# EAGLE board Load_Cape (EAGLE 7.7.0)
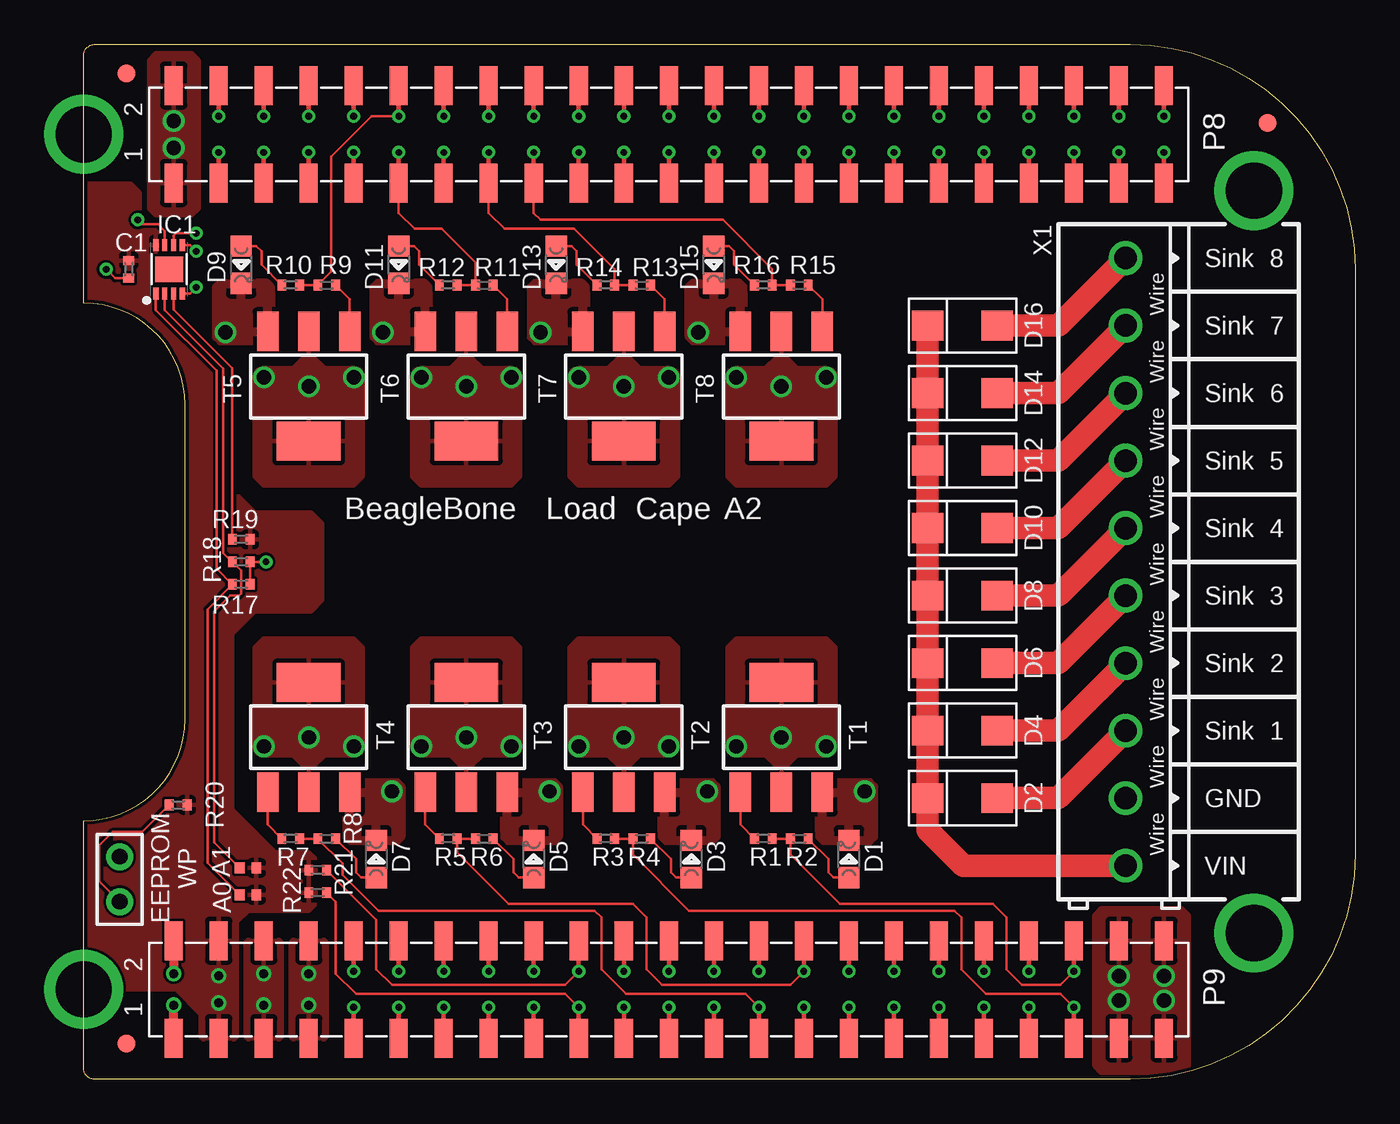
[diagram p0: board, top side]
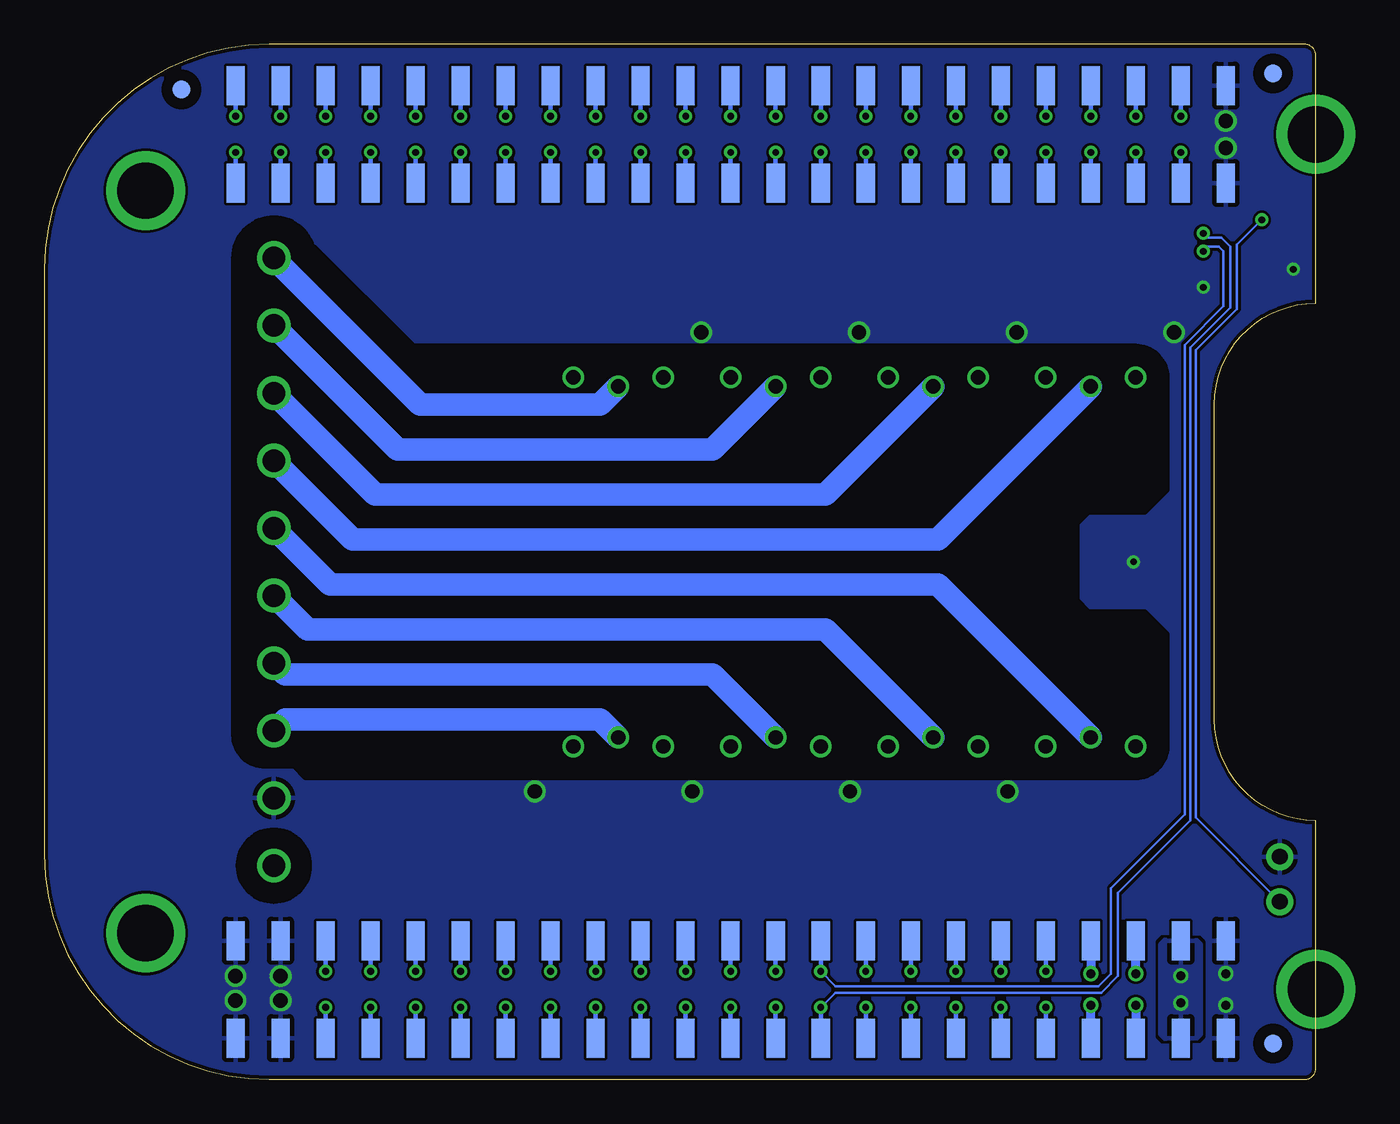
[diagram p1: board, bottom side, seen from below]

Size 71.75 x 58.42 mm. Coordinates in mm from the lower left corner, seen from the top.
Copper layers (1+16): Top 0.035mm / dielectric 1.5mm / Bottom 0.035mm
Design rules "SparkFun-2-layer *": minimum track width 6mil, minimum drill 15mil, track to track 6mil, track to pad 6mil, pad to pad 6mil, via to via 6mil, smd to smd 6mil, copper to edge 8mil, drill to drill 8mil, minimum pad ring 12mil, minimum via ring 7mil, stop-mask expansion 4mil, vias tented up to drill 32mil, thermal gap 10mil
tRestrict: 4 lines

## Footprints (pad centres in the part's own frame; a part is rotated, then mirrored left to right if it is on the bottom)
BEAGLEBONE.CAPE.TOP/BOTTOM-PADS = smd 1.02 x 2.2 bottom: B8.1 5.08,50.59; B8.2 5.08,56.09; B8.3 7.62,50.59; B8.4 7.62,56.09; B8.5 10.16,50.59; B8.6 10.16,56.09; B8.7 12.7,50.59; B8.8 12.7,56.09; B8.9 15.24,50.59; B8.10 15.24,56.09; B8.11 17.78,50.59; B8.12 17.78,56.09; B8.13 20.32,50.59; B8.14 20.32,56.09; B8.15 22.86,50.59; B8.16 22.86,56.09; B8.17 25.4,50.59; B8.18 25.4,56.09; B8.19 27.94,50.59; B8.20 27.94,56.09; B8.21 30.48,50.59; B8.22 30.48,56.09; B8.23 33.02,50.59; B8.24 33.02,56.09; B8.25 35.56,50.59; B8.26 35.56,56.09; B8.27 38.1,50.59; B8.28 38.1,56.09; B8.29 40.64,50.59; B8.30 40.64,56.09; B8.31 43.18,50.59; B8.32 43.18,56.09; B8.33 45.72,50.59; B8.34 45.72,56.09; B8.35 48.26,50.59; B8.36 48.26,56.09; B8.37 50.8,50.59; B8.38 50.8,56.09; B8.39 53.34,50.59; B8.40 53.34,56.09; B8.41 55.88,50.59; B8.42 55.88,56.09; B8.43 58.42,50.59; B8.44 58.42,56.09; B8.45 60.96,50.59; B8.46 60.96,56.09; B9.1 5.08,2.33; B9.2 5.08,7.83; B9.3 7.62,2.33; B9.4 7.62,7.83; B9.5 10.16,2.33; B9.6 10.16,7.83; B9.7 12.7,2.33; B9.8 12.7,7.83; B9.9 15.24,2.33; B9.10 15.24,7.83; B9.11 17.78,2.33; B9.12 17.78,7.83; B9.13 20.32,2.33; B9.14 20.32,7.83; B9.15 22.86,2.33; B9.16 22.86,7.83; B9.17 25.4,2.33; B9.18 25.4,7.83; B9.19 27.94,2.33; B9.20 27.94,7.83; B9.21 30.48,2.33; B9.22 30.48,7.83; B9.23 33.02,2.33; B9.24 33.02,7.83; B9.25 35.56,2.33; B9.26 35.56,7.83; B9.27 38.1,2.33; B9.28 38.1,7.83; B9.29 40.64,2.33; B9.30 40.64,7.83; B9.31 43.18,2.33; B9.32 43.18,7.83; B9.33 45.72,2.33; B9.34 45.72,7.83; B9.35 48.26,2.33; B9.36 48.26,7.83; B9.37 50.8,2.33; B9.38 50.8,7.83; B9.39 53.34,2.33; B9.40 53.34,7.83; B9.41 55.88,2.33; B9.42 55.88,7.83; B9.43 58.42,2.33; B9.44 58.42,7.83; B9.45 60.96,2.33; B9.46 60.96,7.83 | drill 3.175 pad 4.445: MH.1 0,5.08; MH.2 66.04,8.255; MH.3 66.04,50.165; MH.4 0,53.34 | smd 1.02 x 2.2: T8.1 5.08,50.59; T8.2 5.08,56.09; T8.3 7.62,50.59; T8.4 7.62,56.09; T8.5 10.16,50.59; T8.6 10.16,56.09; T8.7 12.7,50.59; T8.8 12.7,56.09; T8.9 15.24,50.59; T8.10 15.24,56.09; T8.11 17.78,50.59; T8.12 17.78,56.09; T8.13 20.32,50.59; T8.14 20.32,56.09; T8.15 22.86,50.59; T8.16 22.86,56.09; T8.17 25.4,50.59; T8.18 25.4,56.09; T8.19 27.94,50.59; T8.20 27.94,56.09; T8.21 30.48,50.59; T8.22 30.48,56.09; T8.23 33.02,50.59; T8.24 33.02,56.09; T8.25 35.56,50.59; T8.26 35.56,56.09; T8.27 38.1,50.59; T8.28 38.1,56.09; T8.29 40.64,50.59; T8.30 40.64,56.09; T8.31 43.18,50.59; T8.32 43.18,56.09; T8.33 45.72,50.59; T8.34 45.72,56.09; T8.35 48.26,50.59; T8.36 48.26,56.09; T8.37 50.8,50.59; T8.38 50.8,56.09; T8.39 53.34,50.59; T8.40 53.34,56.09; T8.41 55.88,50.59; T8.42 55.88,56.09; T8.43 58.42,50.59; T8.44 58.42,56.09; T8.45 60.96,50.59; T8.46 60.96,56.09; T9.1 5.08,2.33; T9.2 5.08,7.83; T9.3 7.62,2.33; T9.4 7.62,7.83; T9.5 10.16,2.33; T9.6 10.16,7.83; T9.7 12.7,2.33; T9.8 12.7,7.83; T9.9 15.24,2.33; T9.10 15.24,7.83; T9.11 17.78,2.33; T9.12 17.78,7.83; T9.13 20.32,2.33; T9.14 20.32,7.83; T9.15 22.86,2.33; T9.16 22.86,7.83; T9.17 25.4,2.33; T9.18 25.4,7.83; T9.19 27.94,2.33; T9.20 27.94,7.83; T9.21 30.48,2.33; T9.22 30.48,7.83; T9.23 33.02,2.33; T9.24 33.02,7.83; T9.25 35.56,2.33; T9.26 35.56,7.83; T9.27 38.1,2.33; T9.28 38.1,7.83; T9.29 40.64,2.33; T9.30 40.64,7.83; T9.31 43.18,2.33; T9.32 43.18,7.83; T9.33 45.72,2.33; T9.34 45.72,7.83; T9.35 48.26,2.33; T9.36 48.26,7.83; T9.37 50.8,2.33; T9.38 50.8,7.83; T9.39 53.34,2.33; T9.40 53.34,7.83; T9.41 55.88,2.33; T9.42 55.88,7.83; T9.43 58.42,2.33; T9.44 58.42,7.83; T9.45 60.96,2.33; T9.46 60.96,7.83
0402 = smd 0.5 x 0.6: 1 -0.5,0; 2 0.5,0
0805-LED = smd 1.2 x 1.2: A 0,1.05; K 0,-1.05
DIODE_SMA = smd 1.778 x 1.676: A -1.905,0; K 2.032,0
FIDUCIAL_40MIL = smd 1.016 x 1.016: P$1 0,0
UDFN8,2X3(ON-SEMI) = smd 0.3 x 0.68: 1 0.75,1.36; 2 0.25,1.36; 3 -0.25,1.36; 4 -0.75,1.36; 5 -0.75,-1.36; 6 -0.25,-1.36; 7 0.25,-1.36; 8 0.75,-1.36 | smd 1.56 x 1.45: P$1 0,0
JUMPER-(X2) = drill 0.889 pad 1.524: 1 -1.27,0; 2 1.27,0
SOLDER.JOINT(0402) = smd 0.55 x 0.6: 1 -0.475,0; 2 0.475,0
SOT223 = smd 1.219 x 2.235: 1 -2.311,-3.099; 2 0,-3.099; 3 2.311,-3.099 | smd 3.6 x 2.2: 4 0,3.099
TERMINAL.BLOCK-10TERM-150MIL.PITCH = drill 1.27 pad 1.905: 1 -17.145,0; 2 -13.335,0; 3 -9.525,0; 4 -5.715,0; 5 -1.905,0; 6 1.905,0; 7 5.715,0; 8 9.525,0; 9 13.335,0; 10 17.145,0

## Placement (x,y rotation side)
BB.CAPE1  BEAGLEBONE.CAPE.TOP/BOTTOM-PADS  [BEAGLEBONE.CAPE.TOP/BOTTOM-PADS]  0,0 0 top
C1  [0402]  2.54,45.72 270 top
D1  RED  [0805-LED]  43.18,12.45 180 top
D2  STPS140A  [DIODE_SMA]  49.66,15.88 180 top
D3  RED  [0805-LED]  34.29,12.45 180 top
D4  STPS140A  [DIODE_SMA]  49.66,19.68 180 top
D5  RED  [0805-LED]  25.4,12.45 180 top
D6  STPS140A  [DIODE_SMA]  49.66,23.5 180 top
D7  RED  [0805-LED]  16.51,12.45 180 top
D8  STPS140A  [DIODE_SMA]  49.66,27.3 180 top
D9  RED  [0805-LED]  8.89,45.97 0 top
D10  STPS140A  [DIODE_SMA]  49.66,31.11 180 top
D11  RED  [0805-LED]  17.78,45.97 0 top
D12  STPS140A  [DIODE_SMA]  49.66,34.92 180 top
D13  RED  [0805-LED]  26.67,45.97 0 top
D14  STPS140A  [DIODE_SMA]  49.66,38.73 180 top
D15  RED  [0805-LED]  35.56,45.97 0 top
D16  STPS140A  [DIODE_SMA]  49.66,42.55 180 top
FUD1  FIDUCIAL  [FIDUCIAL_40MIL]  2.41,2.03 0 top
FUD2  FIDUCIAL  [FIDUCIAL_40MIL]  66.8,53.98 0 top
FUD3  FIDUCIAL  [FIDUCIAL_40MIL]  2.41,56.77 0 top
FUD4  FIDUCIAL  [FIDUCIAL_40MIL]  2.41,2.03 0 bottom
FUD5  FIDUCIAL  [FIDUCIAL_40MIL]  64.01,55.88 0 bottom
FUD6  FIDUCIAL  [FIDUCIAL_40MIL]  2.41,56.77 0 bottom
IC1  [UDFN8,2X3(ON-SEMI)]  4.83,45.72 180 top
JMP1  JUMPER-(X2)  [JUMPER-(X2)]  2.03,11.3 90 top
R1  330  [0402]  38.35,13.59 180 top
R2  1k  [0402]  40.39,13.59 0 top
R3  330  [0402]  29.46,13.59 180 top
R4  1k  [0402]  31.5,13.59 0 top
R5  330  [0402]  20.57,13.59 180 top
R6  1k  [0402]  22.61,13.59 0 top
R7  330  [0402]  11.68,13.59 180 top
R8  1k  [0402]  13.72,13.59 0 top
R9  330  [0402]  13.72,44.83 0 top
R10  1k  [0402]  11.68,44.83 180 top
R11  330  [0402]  22.61,44.83 0 top
R12  1k  [0402]  20.57,44.83 180 top
R13  330  [0402]  31.5,44.83 0 top
R14  1k  [0402]  29.46,44.83 180 top
R15  330  [0402]  40.39,44.83 0 top
R16  1k  [0402]  38.35,44.83 180 top
R17  1k  [0402]  8.89,27.94 180 top
R18  1k  [0402]  8.89,29.21 180 top
R19  1k  [0402]  8.89,30.48 180 top
R20  1k  [0402]  5.33,15.49 0 top
R21  DNP(2.2k)  [0402]  13.21,11.81 180 top
R22  DNP(2.2k)  [0402]  13.21,10.54 180 top
SJ1  [SOLDER.JOINT(0402)]  9.27,10.41 180 top
SJ2  [SOLDER.JOINT(0402)]  9.27,11.94 180 top
T1  PBSS4350Z 50V 3A  [SOT223]  39.37,19.3 0 top
T2  PBSS4350Z 50V 3A  [SOT223]  30.48,19.3 0 top
T3  PBSS4350Z 50V 3A  [SOT223]  21.59,19.3 0 top
T4  PBSS4350Z 50V 3A  [SOT223]  12.7,19.3 0 top
T5  PBSS4350Z 50V 3A  [SOT223]  12.7,39.12 180 top
T6  PBSS4350Z 50V 3A  [SOT223]  21.59,39.12 180 top
T7  PBSS4350Z 50V 3A  [SOT223]  30.48,39.12 180 top
T8  PBSS4350Z 50V 3A  [SOT223]  39.37,39.12 180 top
X1  [TERMINAL.BLOCK-10TERM-150MIL.PITCH]  58.8,29.21 270 top

## Library data of the parts
BB.CAPE1 = GHI-Solutions
C1 D1 D3 D5 D7 D9 D11 D13 D15 R1-R22 = GHI-BasicComponents
D2 D4 D6 D8 D10 D12 D14 D16 FUD1-FUD6 = GHI
IC1 = GHI-IC
JMP1 = GHI-Headers
SJ1 SJ2 = GHI-Miscellaneous
T1-T8 = GHI-Transistors
X1 = GHI-Connectors

## Nets
+5V: BB.CAPE1.B9.7 BB.CAPE1.B9.8 BB.CAPE1.T9.7 BB.CAPE1.T9.8
A0: IC1.1 R17.2 SJ1.2
A1: IC1.2 R18.2 SJ2.2
A2: IC1.3 R19.2
GND: BB.CAPE1.B8.1 BB.CAPE1.B8.2 BB.CAPE1.B9.1 BB.CAPE1.B9.2 BB.CAPE1.B9.43 BB.CAPE1.B9.44 BB.CAPE1.B9.45 BB.CAPE1.B9.46 BB.CAPE1.T8.1 BB.CAPE1.T8.2 BB.CAPE1.T9.1 BB.CAPE1.T9.2 BB.CAPE1.T9.43 BB.CAPE1.T9.44 BB.CAPE1.T9.45 BB.CAPE1.T9.46 C1.2 D1.K D3.K D5.K D7.K D9.K D11.K D13.K D15.K IC1.4 JMP1.2 R17.1 R18.1 T1.3 T2.3 T3.3 T4.3 T5.3 T6.3 T7.3 T8.3 X1.9
N$3: D13.A R14.2
N$4: R13.2 T7.1
N$5: D11.A R12.2
N$6: R11.2 T6.1
N$7: D9.A R10.2
N$8: R9.2 T5.1
N$9: D7.A R8.2
N$10: R7.2 T4.1
N$11: D5.A R6.2
N$12: R5.2 T3.1
N$13: D3.A R4.2
N$35: R3.2 T2.1
N$36: D1.A R2.2
N$37: R1.2 T1.1
N$38: D15.A R16.2
N$39: R15.2 T8.1
P8.3: BB.CAPE1.B8.3 BB.CAPE1.T8.3
P8.4: BB.CAPE1.B8.4 BB.CAPE1.T8.4
P8.5: BB.CAPE1.B8.5 BB.CAPE1.T8.5
P8.6: BB.CAPE1.B8.6 BB.CAPE1.T8.6
P8.7: BB.CAPE1.B8.7 BB.CAPE1.T8.7
P8.8: BB.CAPE1.B8.8 BB.CAPE1.T8.8
P8.9: BB.CAPE1.B8.9 BB.CAPE1.T8.9
P8.10: BB.CAPE1.B8.10 BB.CAPE1.T8.10
P8.13: BB.CAPE1.B8.13 BB.CAPE1.T8.13
P8.14: BB.CAPE1.B8.14 BB.CAPE1.T8.14
P8.16: BB.CAPE1.B8.16 BB.CAPE1.T8.16
P8.18: BB.CAPE1.B8.18 BB.CAPE1.T8.18
P8.19: BB.CAPE1.B8.19 BB.CAPE1.T8.19
P8.20: BB.CAPE1.B8.20 BB.CAPE1.T8.20
P8.21: BB.CAPE1.B8.21 BB.CAPE1.T8.21
P8.22: BB.CAPE1.B8.22 BB.CAPE1.T8.22
P8.23: BB.CAPE1.B8.23 BB.CAPE1.T8.23
P8.24: BB.CAPE1.B8.24 BB.CAPE1.T8.24
P8.25: BB.CAPE1.B8.25 BB.CAPE1.T8.25
P8.26: BB.CAPE1.B8.26 BB.CAPE1.T8.26
P8.27: BB.CAPE1.B8.27 BB.CAPE1.T8.27
P8.28: BB.CAPE1.B8.28 BB.CAPE1.T8.28
P8.29: BB.CAPE1.B8.29 BB.CAPE1.T8.29
P8.30: BB.CAPE1.B8.30 BB.CAPE1.T8.30
P8.31: BB.CAPE1.B8.31 BB.CAPE1.T8.31
P8.32: BB.CAPE1.B8.32 BB.CAPE1.T8.32
P8.33: BB.CAPE1.B8.33 BB.CAPE1.T8.33
P8.34: BB.CAPE1.B8.34 BB.CAPE1.T8.34
P8.35: BB.CAPE1.B8.35 BB.CAPE1.T8.35
P8.36: BB.CAPE1.B8.36 BB.CAPE1.T8.36
P8.37: BB.CAPE1.B8.37 BB.CAPE1.T8.37
P8.38: BB.CAPE1.B8.38 BB.CAPE1.T8.38
P8.39: BB.CAPE1.B8.39 BB.CAPE1.T8.39
P8.40: BB.CAPE1.B8.40 BB.CAPE1.T8.40
P8.41: BB.CAPE1.B8.41 BB.CAPE1.T8.41
P8.42: BB.CAPE1.B8.42 BB.CAPE1.T8.42
P8.43: BB.CAPE1.B8.43 BB.CAPE1.T8.43
P8.44: BB.CAPE1.B8.44 BB.CAPE1.T8.44
P8.45: BB.CAPE1.B8.45 BB.CAPE1.T8.45
P8.46: BB.CAPE1.B8.46 BB.CAPE1.T8.46
P9.9: BB.CAPE1.B9.9 BB.CAPE1.T9.9
P9.10: BB.CAPE1.B9.10 BB.CAPE1.T9.10
P9.11: BB.CAPE1.B9.11 BB.CAPE1.T9.11
P9.12: BB.CAPE1.B9.12 BB.CAPE1.T9.12
P9.13: BB.CAPE1.B9.13 BB.CAPE1.T9.13
P9.14: BB.CAPE1.B9.14 BB.CAPE1.T9.14
P9.15: BB.CAPE1.B9.15 BB.CAPE1.T9.15
P9.16: BB.CAPE1.B9.16 BB.CAPE1.T9.16
P9.17: BB.CAPE1.B9.17 BB.CAPE1.T9.17
P9.18: BB.CAPE1.B9.18 BB.CAPE1.T9.18
P9.21: BB.CAPE1.B9.21 BB.CAPE1.T9.21
P9.22: BB.CAPE1.B9.22 BB.CAPE1.T9.22
P9.23: BB.CAPE1.B9.23 BB.CAPE1.T9.23
P9.24: BB.CAPE1.B9.24 BB.CAPE1.T9.24
P9.25: BB.CAPE1.B9.25 BB.CAPE1.T9.25
P9.26: BB.CAPE1.B9.26 BB.CAPE1.T9.26
P9.28: BB.CAPE1.B9.28 BB.CAPE1.T9.28
P9.29: BB.CAPE1.B9.29 BB.CAPE1.T9.29
P9.31: BB.CAPE1.B9.31 BB.CAPE1.T9.31
P9.32: BB.CAPE1.B9.32 BB.CAPE1.T9.32
P9.33: BB.CAPE1.B9.33 BB.CAPE1.T9.33
P9.34: BB.CAPE1.B9.34 BB.CAPE1.T9.34
P9.35: BB.CAPE1.B9.35 BB.CAPE1.T9.35
P9.36: BB.CAPE1.B9.36 BB.CAPE1.T9.36
P9.37: BB.CAPE1.B9.37 BB.CAPE1.T9.37
P9.38: BB.CAPE1.B9.38 BB.CAPE1.T9.38
P9.39: BB.CAPE1.B9.39 BB.CAPE1.T9.39
P9.40: BB.CAPE1.B9.40 BB.CAPE1.T9.40
SCL: BB.CAPE1.B9.19 BB.CAPE1.T9.19 IC1.6 R22.1
SDA: BB.CAPE1.B9.20 BB.CAPE1.T9.20 IC1.5 R21.1
SINK1: BB.CAPE1.B9.42 BB.CAPE1.T9.42 R1.1 R2.1
SINK1.TB: D2.A T1.2 T1.4 X1.8
SINK2: BB.CAPE1.B9.41 BB.CAPE1.T9.41 R3.1 R4.1
SINK2.TB: D4.A T2.2 T2.4 X1.7
SINK3: BB.CAPE1.B9.30 BB.CAPE1.T9.30 R5.1 R6.1
SINK3.TB: D6.A T3.2 T3.4 X1.6
SINK4: BB.CAPE1.B9.27 BB.CAPE1.T9.27 R7.1 R8.1
SINK4.TB: D8.A T4.2 T4.4 X1.5
SINK5: BB.CAPE1.B8.12 BB.CAPE1.T8.12 R9.1 R10.1
SINK5.TB: D10.A T5.2 T5.4 X1.4
SINK6: BB.CAPE1.B8.11 BB.CAPE1.T8.11 R11.1 R12.1
SINK6.TB: D12.A T6.2 T6.4 X1.3
SINK7: BB.CAPE1.B8.15 BB.CAPE1.T8.15 R13.1 R14.1
SINK7.TB: D14.A T7.2 T7.4 X1.2
SINK8: BB.CAPE1.B8.17 BB.CAPE1.T8.17 R15.1 R16.1
SINK8.TB: D16.A T8.2 T8.4 X1.1
VCC: BB.CAPE1.B9.3 BB.CAPE1.B9.4 BB.CAPE1.T9.3 BB.CAPE1.T9.4 C1.1 IC1.8 R19.1 R20.2 R21.2 R22.2 SJ1.1 SJ2.1
VDD_5V: BB.CAPE1.B9.5 BB.CAPE1.B9.6 BB.CAPE1.T9.5 BB.CAPE1.T9.6
VIN: D2.K D4.K D6.K D8.K D10.K D12.K D14.K D16.K X1.10
WP: IC1.7 JMP1.1 R20.1

## Tracks (layer width: path | path; a pad name or v marks a point on that pad's centre or on a via)
+5V  (via drill 0.51 pad 0.18)
  Bottom 0.508: BB.CAPE1.B9.8 v12.7,5.97 | BB.CAPE1.B9.7 v12.7,4.19
  pour Top (rank 2): 13.34,8.13 12.06,8.13 11.68,7.75 11.68,2.41 12.06,2.03 13.34,2.03 13.72,2.41 13.72,7.75
A0
  Top 0.152: IC1.1 4.08,43.42 7.49,40.01 7.49,28.84 R17.2 6.99,26.54 6.99,12.22 SJ1.2
A1
  Top 0.152: IC1.2 4.58,43.43 7.88,40.13 7.88,29.72 R18.2 8.89,28.71 8.89,27.43 8.76,27.3 8.26,27.3 7.37,26.42 7.37,13.37 SJ2.2
A2
  Top 0.152: 8.38,30.49 R19.2 8.38,40.13 5.08,43.44 IC1.3
GND  (via drill 0.38 pad 0.18, 0.51 pad 0.18, 0.81 pad 0.18)
  Top 0.152: IC1.4 6.01,44.36 v6.35,44.7 | R17.1 R18.1 v10.29,29.21 | C1.2 1.77,45.22 v1.27,45.72
  Top 0.508: BB.CAPE1.T9.2 v5.08,5.97 | BB.CAPE1.T9.1 v5.08,4.19
  other vias: 44.07,16.26 35.18,16.26 26.29,16.26 17.4,16.26 8,42.16 16.89,42.16 25.78,42.16 34.67,42.16 58.42,4.45 60.96,4.45 5.08,52.58 58.42,5.84 60.96,5.84 5.08,54.1
  pour Bottom (rank 2): 72.39,59.05 -0.64,59.05 -0.64,-0.64 72.39,-0.64
  pour Top: 41.53,16.76 44.32,16.76 44.58,16.51 44.58,13.72 44.32,13.46 41.78,13.46 41.53,13.72
  pour Top: 32.64,16.76 35.43,16.76 35.69,16.51 35.69,13.72 35.43,13.46 32.89,13.46 32.64,13.72
  pour Top: 23.75,16.76 26.54,16.76 26.8,16.51 26.8,13.72 26.54,13.46 24,13.46 23.75,13.72
  pour Top: 14.86,16.76 17.65,16.76 17.91,16.51 17.91,13.72 17.65,13.46 15.11,13.46 14.86,13.72
  pour Top: 10.54,41.66 7.75,41.66 7.49,41.91 7.49,44.7 7.75,44.96 10.29,44.96 10.54,44.7
  pour Top: 19.43,41.66 16.64,41.66 16.38,41.91 16.38,44.7 16.64,44.96 19.18,44.96 19.43,44.7
  pour Top: 28.32,41.66 25.53,41.66 25.27,41.91 25.27,44.7 25.53,44.96 28.07,44.96 28.32,44.7
  pour Top: 37.21,41.66 34.42,41.66 34.16,41.91 34.16,44.7 34.42,44.96 36.96,44.96 37.21,44.7
  pour Top: 61.98,9.65 57.4,9.65 57.02,9.27 57.02,0.76 57.4,0.38 61.98,0.38 62.36,0.76 62.36,9.27
  pour Top: 4.06,57.91 6.1,57.91 6.48,57.53 6.48,49.15 6.1,48.77 4.06,48.77 3.68,49.15 3.68,57.53
N$3
  Top 0.152: R14.2 27.81,45.98 27.81,46.74 27.52,47.02 D13.A
N$4
  Top 0.152: T7.1 32.79,44.04 R13.2
N$5
  Top 0.152: R12.2 18.92,45.98 18.92,46.74 18.64,47.02 D11.A
N$6
  Top 0.152: T6.1 23.9,44.04 R11.2
N$7
  Top 0.152: R10.2 10.03,45.98 10.03,46.74 9.74,47.02 D9.A
N$8
  Top 0.152: T5.1 15.01,44.04 R9.2
N$9
  Top 0.152: R8.2 15.37,12.44 15.37,11.68 15.65,11.4 D7.A
N$10
  Top 0.152: T4.1 10.39,14.38 R7.2
N$11
  Top 0.152: R6.2 24.26,12.44 24.26,11.68 24.55,11.4 D5.A
N$12
  Top 0.152: T3.1 19.28,14.38 R5.2
N$13
  Top 0.152: R4.2 33.15,12.44 33.15,11.68 33.44,11.4 D3.A
N$35
  Top 0.152: T2.1 28.17,14.38 R3.2
N$36
  Top 0.152: R2.2 42.04,12.44 42.04,11.68 42.33,11.4 D1.A
N$37
  Top 0.152: T1.1 37.06,14.38 R1.2
N$38
  Top 0.152: R16.2 36.7,45.98 36.7,46.74 36.41,47.02 D15.A
N$39
  Top 0.152: T8.1 41.68,44.04 R15.2
N$40
  cutout Bottom: 8.38,18.8 8.38,25.15 9.65,26.42 12.83,26.42 13.46,27.05 13.46,31.37 12.83,32 9.65,32 8.38,33.27 8.38,39.62 arc-90 10.16,41.4 50.93,41.4 56.52,46.99 56.52,46.35 arc-90 58.8,48.64 arc-90 61.09,46.35 61.09,19.43 arc-90 59.31,17.65 57.66,17.65 57.02,17.02 10.16,17.02 arc-90
N$41
  cutout Bottom: 58.8,10.03 arc-90 56.77,12.06 arc-90 58.8,14.1 arc-90 60.83,12.06 arc-90
P8.3  (via drill 0.38 pad 0.18)
  Top 0.254: BB.CAPE1.B8.3 v7.62,52.32
  Bottom 0.254: v7.62,52.32 BB.CAPE1.B8.3
P8.4  (via drill 0.38 pad 0.18)
  Top 0.254: v7.62,54.36 BB.CAPE1.T8.4
  Bottom 0.254: BB.CAPE1.T8.4 v7.62,54.36
P8.5  (via drill 0.38 pad 0.18)
  Top 0.254: v10.16,52.32 BB.CAPE1.T8.5
  Bottom 0.254: BB.CAPE1.T8.5 v10.16,52.32
P8.6  (via drill 0.38 pad 0.18)
  Top 0.254: BB.CAPE1.T8.6 v10.16,54.36
  Bottom 0.254: v10.16,54.36 BB.CAPE1.T8.6
P8.7  (via drill 0.38 pad 0.18)
  Top 0.254: BB.CAPE1.B8.7 v12.7,52.32
  Bottom 0.254: v12.7,52.32 BB.CAPE1.B8.7
P8.8  (via drill 0.38 pad 0.18)
  Top 0.254: v12.7,54.36 BB.CAPE1.T8.8
  Bottom 0.254: BB.CAPE1.T8.8 v12.7,54.36
P8.9  (via drill 0.38 pad 0.18)
  Top 0.254: v15.24,52.32 BB.CAPE1.T8.9
  Bottom 0.254: BB.CAPE1.T8.9 v15.24,52.32
P8.10  (via drill 0.38 pad 0.18)
  Top 0.254: BB.CAPE1.T8.10 v15.24,54.36
  Bottom 0.254: v15.24,54.36 BB.CAPE1.T8.10
P8.13  (via drill 0.38 pad 0.18)
  Top 0.254: BB.CAPE1.T8.13 v20.32,52.32
  Bottom 0.254: v20.32,52.32 BB.CAPE1.T8.13
P8.14  (via drill 0.38 pad 0.18)
  Top 0.254: v20.32,54.36 BB.CAPE1.T8.14
  Bottom 0.254: BB.CAPE1.T8.14 v20.32,54.36
P8.16  (via drill 0.38 pad 0.18)
  Top 0.254: v22.86,54.36 BB.CAPE1.T8.16
  Bottom 0.254: BB.CAPE1.T8.16 v22.86,54.36
P8.18  (via drill 0.38 pad 0.18)
  Top 0.254: BB.CAPE1.T8.18 v25.4,54.36
  Bottom 0.254: v25.4,54.36 BB.CAPE1.T8.18
P8.19  (via drill 0.38 pad 0.18)
  Top 0.254: BB.CAPE1.T8.19 v27.94,52.32
  Bottom 0.254: v27.94,52.32 BB.CAPE1.T8.19
P8.20  (via drill 0.38 pad 0.18)
  Top 0.254: v27.94,54.36 BB.CAPE1.B8.20
  Bottom 0.254: BB.CAPE1.B8.20 v27.94,54.36
P8.21  (via drill 0.38 pad 0.18)
  Top 0.254: v30.48,52.32 BB.CAPE1.T8.21
  Bottom 0.254: BB.CAPE1.T8.21 v30.48,52.32
P8.22  (via drill 0.38 pad 0.18)
  Top 0.254: v30.48,54.36 BB.CAPE1.T8.22
  Bottom 0.254: BB.CAPE1.T8.22 v30.48,54.36
P8.23  (via drill 0.38 pad 0.18)
  Top 0.254: BB.CAPE1.T8.23 v33.02,52.32
  Bottom 0.254: v33.02,52.32 BB.CAPE1.T8.23
P8.24  (via drill 0.38 pad 0.18)
  Top 0.254: BB.CAPE1.T8.24 v33.02,54.36
  Bottom 0.254: v33.02,54.36 BB.CAPE1.T8.24
P8.25  (via drill 0.38 pad 0.18)
  Top 0.254: v35.56,52.32 BB.CAPE1.B8.25
  Bottom 0.254: BB.CAPE1.B8.25 v35.56,52.32
P8.26  (via drill 0.38 pad 0.18)
  Top 0.254: v35.56,54.36 BB.CAPE1.B8.26
  Bottom 0.254: BB.CAPE1.B8.26 v35.56,54.36
P8.27  (via drill 0.38 pad 0.18)
  Top 0.254: BB.CAPE1.B8.27 v38.1,52.32
  Bottom 0.254: v38.1,52.32 BB.CAPE1.B8.27
P8.28  (via drill 0.38 pad 0.18)
  Top 0.254: BB.CAPE1.T8.28 v38.1,54.36
  Bottom 0.254: v38.1,54.36 BB.CAPE1.T8.28
P8.29  (via drill 0.38 pad 0.18)
  Top 0.254: v40.64,52.32 BB.CAPE1.T8.29
  Bottom 0.254: BB.CAPE1.T8.29 v40.64,52.32
P8.30  (via drill 0.38 pad 0.18)
  Top 0.254: v40.64,54.36 BB.CAPE1.T8.30
  Bottom 0.254: BB.CAPE1.T8.30 v40.64,54.36
P8.31  (via drill 0.38 pad 0.18)
  Top 0.254: BB.CAPE1.T8.31 v43.18,52.32
  Bottom 0.254: v43.18,52.32 BB.CAPE1.T8.31
P8.32  (via drill 0.38 pad 0.18)
  Top 0.254: BB.CAPE1.T8.32 v43.18,54.36
  Bottom 0.254: v43.18,54.36 BB.CAPE1.T8.32
P8.33  (via drill 0.38 pad 0.18)
  Top 0.254: v45.72,52.32 BB.CAPE1.T8.33
  Bottom 0.254: BB.CAPE1.T8.33 v45.72,52.32
P8.34  (via drill 0.38 pad 0.18)
  Top 0.254: BB.CAPE1.B8.34 v45.72,54.36
  Bottom 0.254: v45.72,54.36 BB.CAPE1.B8.34
P8.35  (via drill 0.38 pad 0.18)
  Top 0.254: BB.CAPE1.B8.35 v48.26,52.32
  Bottom 0.254: v48.26,52.32 BB.CAPE1.B8.35
P8.36  (via drill 0.38 pad 0.18)
  Top 0.254: v48.26,54.36 BB.CAPE1.B8.36
  Bottom 0.254: BB.CAPE1.B8.36 v48.26,54.36
P8.37  (via drill 0.38 pad 0.18)
  Top 0.254: v50.8,52.32 BB.CAPE1.B8.37
  Bottom 0.254: BB.CAPE1.B8.37 v50.8,52.32
P8.38  (via drill 0.38 pad 0.18)
  Top 0.254: BB.CAPE1.T8.38 v50.8,54.36
  Bottom 0.254: v50.8,54.36 BB.CAPE1.T8.38
P8.39  (via drill 0.38 pad 0.18)
  Top 0.254: BB.CAPE1.T8.39 v53.34,52.32
  Bottom 0.254: v53.34,52.32 BB.CAPE1.T8.39
P8.40  (via drill 0.38 pad 0.18)
  Top 0.254: v53.34,54.36 BB.CAPE1.B8.40
  Bottom 0.254: BB.CAPE1.B8.40 v53.34,54.36
P8.41  (via drill 0.38 pad 0.18)
  Top 0.254: v55.88,52.32 BB.CAPE1.T8.41
  Bottom 0.254: BB.CAPE1.T8.41 v55.88,52.32
P8.42  (via drill 0.38 pad 0.18)
  Top 0.254: BB.CAPE1.B8.42 v55.88,54.36
  Bottom 0.254: v55.88,54.36 BB.CAPE1.B8.42
P8.43  (via drill 0.38 pad 0.18)
  Top 0.254: BB.CAPE1.T8.43 v58.42,52.32
  Bottom 0.254: v58.42,52.32 BB.CAPE1.T8.43
P8.44  (via drill 0.38 pad 0.18)
  Top 0.254: v58.42,54.36 BB.CAPE1.T8.44
  Bottom 0.254: BB.CAPE1.T8.44 v58.42,54.36
P8.45  (via drill 0.38 pad 0.18)
  Top 0.254: v60.96,52.32 BB.CAPE1.T8.45
  Bottom 0.254: BB.CAPE1.T8.45 v60.96,52.32
P8.46  (via drill 0.38 pad 0.18)
  Top 0.254: BB.CAPE1.T8.46 v60.96,54.36
  Bottom 0.254: v60.96,54.36 BB.CAPE1.T8.46
P9.9  (via drill 0.38 pad 0.18)
  Top 0.254: BB.CAPE1.T9.9 v15.24,4.06
  Bottom 0.254: v15.24,4.06 BB.CAPE1.T9.9
P9.10  (via drill 0.38 pad 0.18)
  Top 0.254: v15.24,6.1 BB.CAPE1.B9.10
  Bottom 0.254: BB.CAPE1.B9.10 v15.24,6.1
P9.11  (via drill 0.38 pad 0.18)
  Top 0.254: v17.78,4.06 BB.CAPE1.B9.11
  Bottom 0.254: BB.CAPE1.B9.11 v17.78,4.06
P9.12  (via drill 0.38 pad 0.18)
  Top 0.254: BB.CAPE1.B9.12 v17.78,6.1
  Bottom 0.254: v17.78,6.1 BB.CAPE1.B9.12
P9.13  (via drill 0.38 pad 0.18)
  Top 0.254: BB.CAPE1.T9.13 v20.32,4.06
  Bottom 0.254: v20.32,4.06 BB.CAPE1.T9.13
P9.14  (via drill 0.38 pad 0.18)
  Top 0.254: v20.32,6.1 BB.CAPE1.B9.14
  Bottom 0.254: BB.CAPE1.B9.14 v20.32,6.1
P9.15  (via drill 0.38 pad 0.18)
  Top 0.254: v22.86,4.06 BB.CAPE1.B9.15
  Bottom 0.254: BB.CAPE1.B9.15 v22.86,4.06
P9.16  (via drill 0.38 pad 0.18)
  Top 0.254: BB.CAPE1.B9.16 v22.86,6.1
  Bottom 0.254: v22.86,6.1 BB.CAPE1.B9.16
P9.17  (via drill 0.38 pad 0.18)
  Top 0.254: BB.CAPE1.T9.17 v25.4,4.06
  Bottom 0.254: v25.4,4.06 BB.CAPE1.T9.17
P9.18  (via drill 0.38 pad 0.18)
  Top 0.254: v25.4,6.1 BB.CAPE1.T9.18
  Bottom 0.254: BB.CAPE1.T9.18 v25.4,6.1
P9.21  (via drill 0.38 pad 0.18)
  Top 0.254: BB.CAPE1.T9.21 v30.48,4.06
  Bottom 0.254: v30.48,4.06 BB.CAPE1.T9.21
P9.22  (via drill 0.38 pad 0.18)
  Top 0.254: BB.CAPE1.T9.22 v30.48,6.1
  Bottom 0.254: v30.48,6.1 BB.CAPE1.T9.22
P9.23  (via drill 0.38 pad 0.18)
  Top 0.254: v33.02,4.06 BB.CAPE1.T9.23
  Bottom 0.254: BB.CAPE1.T9.23 v33.02,4.06
P9.24  (via drill 0.38 pad 0.18)
  Top 0.254: v33.02,6.1 BB.CAPE1.T9.24
  Bottom 0.254: BB.CAPE1.T9.24 v33.02,6.1
P9.25  (via drill 0.38 pad 0.18)
  Top 0.254: BB.CAPE1.B9.25 v35.56,4.06
  Bottom 0.254: v35.56,4.06 BB.CAPE1.B9.25
P9.26  (via drill 0.38 pad 0.18)
  Top 0.254: BB.CAPE1.T9.26 v35.56,6.1
  Bottom 0.254: v35.56,6.1 BB.CAPE1.T9.26
P9.28  (via drill 0.38 pad 0.18)
  Top 0.254: v38.1,6.1 BB.CAPE1.B9.28
  Bottom 0.254: BB.CAPE1.B9.28 v38.1,6.1
P9.29  (via drill 0.38 pad 0.18)
  Top 0.254: v40.64,4.06 BB.CAPE1.B9.29
  Bottom 0.254: BB.CAPE1.B9.29 v40.64,4.06
P9.31  (via drill 0.38 pad 0.18)
  Top 0.254: BB.CAPE1.B9.31 v43.18,4.06
  Bottom 0.254: v43.18,4.06 BB.CAPE1.B9.31
P9.32  (via drill 0.38 pad 0.18)
  Top 0.254: BB.CAPE1.T9.32 v43.18,6.1
  Bottom 0.254: v43.18,6.1 BB.CAPE1.T9.32
P9.33  (via drill 0.38 pad 0.18)
  Top 0.254: v45.72,4.06 BB.CAPE1.T9.33
  Bottom 0.254: BB.CAPE1.T9.33 v45.72,4.06
P9.34  (via drill 0.38 pad 0.18)
  Top 0.254: v45.72,6.1 BB.CAPE1.T9.34
  Bottom 0.254: BB.CAPE1.T9.34 v45.72,6.1
P9.35  (via drill 0.38 pad 0.18)
  Top 0.254: BB.CAPE1.B9.35 v48.26,4.06
  Bottom 0.254: v48.26,4.06 BB.CAPE1.B9.35
P9.36  (via drill 0.38 pad 0.18)
  Top 0.254: v48.26,6.1 BB.CAPE1.T9.36
  Bottom 0.254: BB.CAPE1.T9.36 v48.26,6.1
P9.37  (via drill 0.38 pad 0.18)
  Top 0.254: v50.8,4.06 BB.CAPE1.T9.37
  Bottom 0.254: BB.CAPE1.T9.37 v50.8,4.06
P9.38  (via drill 0.38 pad 0.18)
  Top 0.254: BB.CAPE1.B9.38 v50.8,6.1
  Bottom 0.254: v50.8,6.1 BB.CAPE1.B9.38
P9.39  (via drill 0.38 pad 0.18)
  Top 0.254: BB.CAPE1.B9.39 v53.34,4.06
  Bottom 0.254: v53.34,4.06 BB.CAPE1.B9.39
P9.40  (via drill 0.38 pad 0.18)
  Top 0.254: v53.34,6.1 BB.CAPE1.T9.40
  Bottom 0.254: BB.CAPE1.T9.40 v53.34,6.1
SCL  (via drill 0.38 pad 0.18)
  Top 0.152: IC1.6 5.08,47.62 5.21,47.75 v6.35,47.75 | v27.94,4.06 27.18,4.83 15.37,4.83 14.22,5.97 14.22,10.03 R22.1
  Top 0.254: v27.94,4.06 BB.CAPE1.T9.19
  Bottom 0.152: v6.35,47.75 6.1,47.5 5.33,47.5 4.83,46.99 4.83,43.56 7.09,41.3 7.09,14.63 11.18,10.54 11.18,5.84 12.12,4.9 27.1,4.9 v27.94,4.06
  Bottom 0.254: v27.94,4.06 BB.CAPE1.T9.19
SDA  (via drill 0.38 pad 0.18)
  Top 0.152: IC1.5 6.01,47.08 v6.35,46.74 | v27.94,6.1 27.18,5.33 17.4,5.33 16.51,6.22 16.51,9.01 R21.1
  Top 0.254: v27.94,6.1 BB.CAPE1.T9.20
  Bottom 0.152: v6.35,46.74 6.1,46.99 5.46,46.99 5.21,46.74 5.21,43.64 7.39,41.45 7.39,14.96 11.56,10.79 11.56,5.97 12.27,5.26 27.1,5.26 v27.94,6.1
  Bottom 0.254: v27.94,6.1 BB.CAPE1.T9.20
SINK1  (via drill 0.38 pad 0.18)
  Top 0.152: R1.1 R2.1 39.89,12.69 42.67,9.91 51.31,9.91 52.07,9.14 52.07,6.22 52.96,5.33 55.12,5.33 v55.88,6.1
  Top 0.254: BB.CAPE1.T9.42 v55.88,6.1
  Bottom 0.254: BB.CAPE1.T9.42 v55.88,6.1
SINK1.TB  (via drill 0.81 pad 0.18)
  Top 1.27: X1.8 54.99,15.88 D2.A
  Bottom 1.27: X1.8 58.17,20.32 40.39,20.32 v39.37,19.3
  other vias: 41.91,18.8 36.83,18.8
  pour Top: 40.26,18.29 41.91,18.29 arc90 42.42,18.8 42.42,24.38 41.91,24.89 36.83,24.89 36.32,24.38 36.32,18.8 arc90 36.83,18.29 38.48,18.29 39.12,17.65 39.12,15.37 39.62,15.37 39.62,17.65
SINK2  (via drill 0.38 pad 0.18)
  Top 0.152: R3.1 R4.1 31,12.69 34.16,9.53 49.15,9.53 49.53,9.14 49.53,6.22 50.93,4.83 55.12,4.83 v55.88,4.06
  Top 0.254: v55.88,4.06 BB.CAPE1.B9.41
  Bottom 0.254: v55.88,4.06 BB.CAPE1.B9.41
SINK2.TB  (via drill 0.81 pad 0.18)
  Top 1.27: X1.7 54.99,19.68 D4.A
  Bottom 1.27: X1.7 58.17,22.86 34.04,22.86 v30.48,19.3
  other vias: 33.02,18.8 27.94,18.8
  pour Top: 31.37,18.29 33.02,18.29 arc90 33.53,18.8 33.53,24.38 33.02,24.89 27.94,24.89 27.43,24.38 27.43,18.8 arc90 27.94,18.29 29.59,18.29 30.23,17.65 30.23,15.37 30.73,15.37 30.73,17.65
SINK3  (via drill 0.38 pad 0.18)
  Top 0.152: R6.1 R5.1 21.07,12.82 23.99,9.91 30.99,9.91 31.75,9.14 31.75,6.22 32.64,5.33 39.88,5.33 v40.64,6.1
  Top 0.254: BB.CAPE1.B9.30 v40.64,6.1
  Bottom 0.254: v40.64,6.1 BB.CAPE1.B9.30
SINK3.TB  (via drill 0.81 pad 0.18)
  Top 1.27: X1.6 54.99,23.5 D6.A
  Bottom 1.27: X1.6 56.9,25.4 27.69,25.4 v21.59,19.3
  other vias: 24.13,18.8 19.05,18.8
  pour Top: 22.48,18.29 24.13,18.29 arc90 24.64,18.8 24.64,24.38 24.13,24.89 19.05,24.89 18.54,24.38 18.54,18.8 arc90 19.05,18.29 20.7,18.29 21.34,17.65 21.34,15.37 21.84,15.37 21.84,17.65
SINK4  (via drill 0.38 pad 0.18)
  Top 0.152: R7.1 R8.1 14.61,12.2 14.61,11.56 16.64,9.53 28.83,9.53 29.21,9.14 29.21,6.22 30.61,4.83 37.34,4.83 v38.1,4.06
  Top 0.254: v38.1,4.06 BB.CAPE1.B9.27
  Bottom 0.254: BB.CAPE1.B9.27 v38.1,4.06
SINK4.TB  (via drill 0.81 pad 0.18)
  Top 1.27: X1.5 54.99,27.3 D8.A
  Bottom 1.27: X1.5 55.63,27.94 21.34,27.94 v12.7,19.3
  other vias: 10.16,18.8 15.24,18.8
  pour Top: 13.59,18.29 15.24,18.29 arc90 15.75,18.8 15.75,24.38 15.24,24.89 10.16,24.89 9.65,24.38 9.65,18.8 arc90 10.16,18.29 11.81,18.29 12.45,17.65 12.45,15.37 12.95,15.37 12.95,17.65
SINK5  (via drill 0.38 pad 0.18)
  Top 0.152: R10.1 R9.1 13.97,45.59 13.97,52.07 16.26,54.36 v17.78,54.36
  Top 0.254: v17.78,54.36 BB.CAPE1.T8.12
  Bottom 0.254: v17.78,54.36 BB.CAPE1.T8.12
SINK5.TB  (via drill 0.81 pad 0.18)
  Top 1.27: X1.4 54.99,31.11 D10.A
  Bottom 1.27: X1.4 54.36,30.48 21.34,30.48 v12.7,39.12
  other vias: 10.16,39.62 15.24,39.62
  pour Top: 11.81,40.13 10.16,40.13 arc90 9.65,39.62 9.65,34.04 10.16,33.53 15.24,33.53 15.75,34.04 15.75,39.62 arc90 15.24,40.13 13.59,40.13 12.95,40.77 12.95,43.05 12.45,43.05 12.45,40.77
SINK6  (via drill 0.38 pad 0.18)
  Top 0.152: R12.1 R11.1 22.11,46.09 20.19,48.01 18.67,48.01 17.78,48.9 BB.CAPE1.B8.11
  Top 0.254: v17.78,52.32 BB.CAPE1.B8.11
  Bottom 0.254: v17.78,52.32 BB.CAPE1.B8.11
SINK6.TB  (via drill 0.81 pad 0.18)
  Top 1.27: X1.3 54.99,34.92 D12.A
  Bottom 1.27: X1.3 53.09,33.02 27.69,33.02 v21.59,39.12
  other vias: 24.13,39.62 19.05,39.62
  pour Top: 20.7,40.13 19.05,40.13 arc90 18.54,39.62 18.54,34.04 19.05,33.53 24.13,33.53 24.64,34.04 24.64,39.62 arc90 24.13,40.13 22.48,40.13 21.84,40.77 21.84,43.05 21.34,43.05 21.34,40.77
SINK7  (via drill 0.38 pad 0.18)
  Top 0.152: R13.1 R14.1 29.96,45.73 27.69,48.01 23.75,48.01 22.86,48.9 BB.CAPE1.B8.15
  Top 0.254: BB.CAPE1.B8.15 v22.86,52.32
  Bottom 0.254: v22.86,52.32 BB.CAPE1.B8.15
SINK7.TB  (via drill 0.81 pad 0.18)
  Top 1.27: D14.A 54.99,38.73 X1.2
  Bottom 1.27: v30.48,39.12 34.04,35.56 51.82,35.56 X1.2
  other vias: 33.02,39.62 27.94,39.62
  pour Top: 29.59,40.13 27.94,40.13 arc90 27.43,39.62 27.43,34.04 27.94,33.53 33.02,33.53 33.53,34.04 33.53,39.62 arc90 33.02,40.13 31.37,40.13 30.73,40.77 30.73,43.05 30.23,43.05 30.23,40.77
SINK8  (via drill 0.38 pad 0.18)
  Top 0.152: R15.1 R16.1 38.85,45.73 36.07,48.51 25.78,48.51 25.4,48.9 BB.CAPE1.T8.17
  Top 0.254: v25.4,52.32 BB.CAPE1.T8.17
  Bottom 0.254: BB.CAPE1.T8.17 v25.4,52.32
SINK8.TB  (via drill 0.81 pad 0.18)
  Top 1.27: X1.1 54.99,42.55 D16.A
  Bottom 1.27: X1.1 50.55,38.1 40.39,38.1 v39.37,39.12
  other vias: 36.83,39.62 41.91,39.62
  pour Top: 38.48,40.13 36.83,40.13 arc90 36.32,39.62 36.32,34.04 36.83,33.53 41.91,33.53 42.42,34.04 42.42,39.62 arc90 41.91,40.13 40.26,40.13 39.62,40.77 39.62,43.05 39.12,43.05 39.12,40.77
VCC  (via drill 0.51 pad 0.18)
  other vias: 7.62,5.84 7.62,4.32
  pour Bottom: 8.26,8.13 6.99,8.13 6.48,7.62 6.48,2.54 6.99,2.03 8.26,2.03 8.76,2.54 8.76,7.62
  pour Top: 6.99,2.03 8.26,2.03 8.64,2.41 8.64,8.89 9.27,9.53 12.7,9.53 13.08,9.91 13.08,12.45 12.7,12.83 10.79,12.83 8.38,15.24 8.38,25.15 9.65,26.42 12.83,26.42 13.46,27.05 13.46,31.37 12.83,32 9.65,32 8.38,33.27 8.38,40.13 6.86,41.66 6.86,47.62 6.22,48.26 3.81,48.26 3.17,48.9 3.17,50.04 2.67,50.55 -0.38,50.55 -0.38,5.08 5.21,5.08 6.6,3.68 6.6,2.41
VDD_5V  (via drill 0.51 pad 0.18)
  Bottom 0.508: v10.16,4.19 BB.CAPE1.B9.5 | v10.16,5.97 BB.CAPE1.B9.6
  pour Top (rank 2): 10.79,8.13 9.53,8.13 9.14,7.75 9.14,2.41 9.53,2.03 10.79,2.03 11.18,2.41 11.18,7.75
VIN
  Top 1.27: X1.10 49.66,12.06 47.62,14.1 D2.K D4.K D6.K D8.K D10.K D12.K D14.K D16.K
WP  (via drill 0.38 pad 0.18)
  Top 0.152: IC1.7 4.58,47.88 4.2,48.26 3.3,48.26 v3.05,48.51 | R20.1 3.31,13.97 1.65,13.97 0.89,13.21 0.89,11.18 JMP1.1
  Bottom 0.152: v3.05,48.51 4.45,47.12 4.45,43.48 6.78,41.15 6.78,14.78 JMP1.1

## Text on the board
tPlace: Sink | 8 | Sink | 7 | Sink | 6 | Sink | 5 | BeagleBone | Load | Cape | A2 | Sink | 4 | Sink | 3 | Sink | 2 | Sink | 1 | GND | EEPROM / WP | VIN | A1 | A0